# Altium PCB 海关全向控制器主控板V4.PcbDoc (part 3 of 3)
Units mil, origin at the board's own origin, x right, y up, seen from the top; angles counter-clockwise.
Board outline 3779.53 x 2795.28 mil, 2 copper layers (Top Layer, Bottom Layer), stack 65.792 mil thick; 119 components, 89 nets, 395 pads, 56 vias.
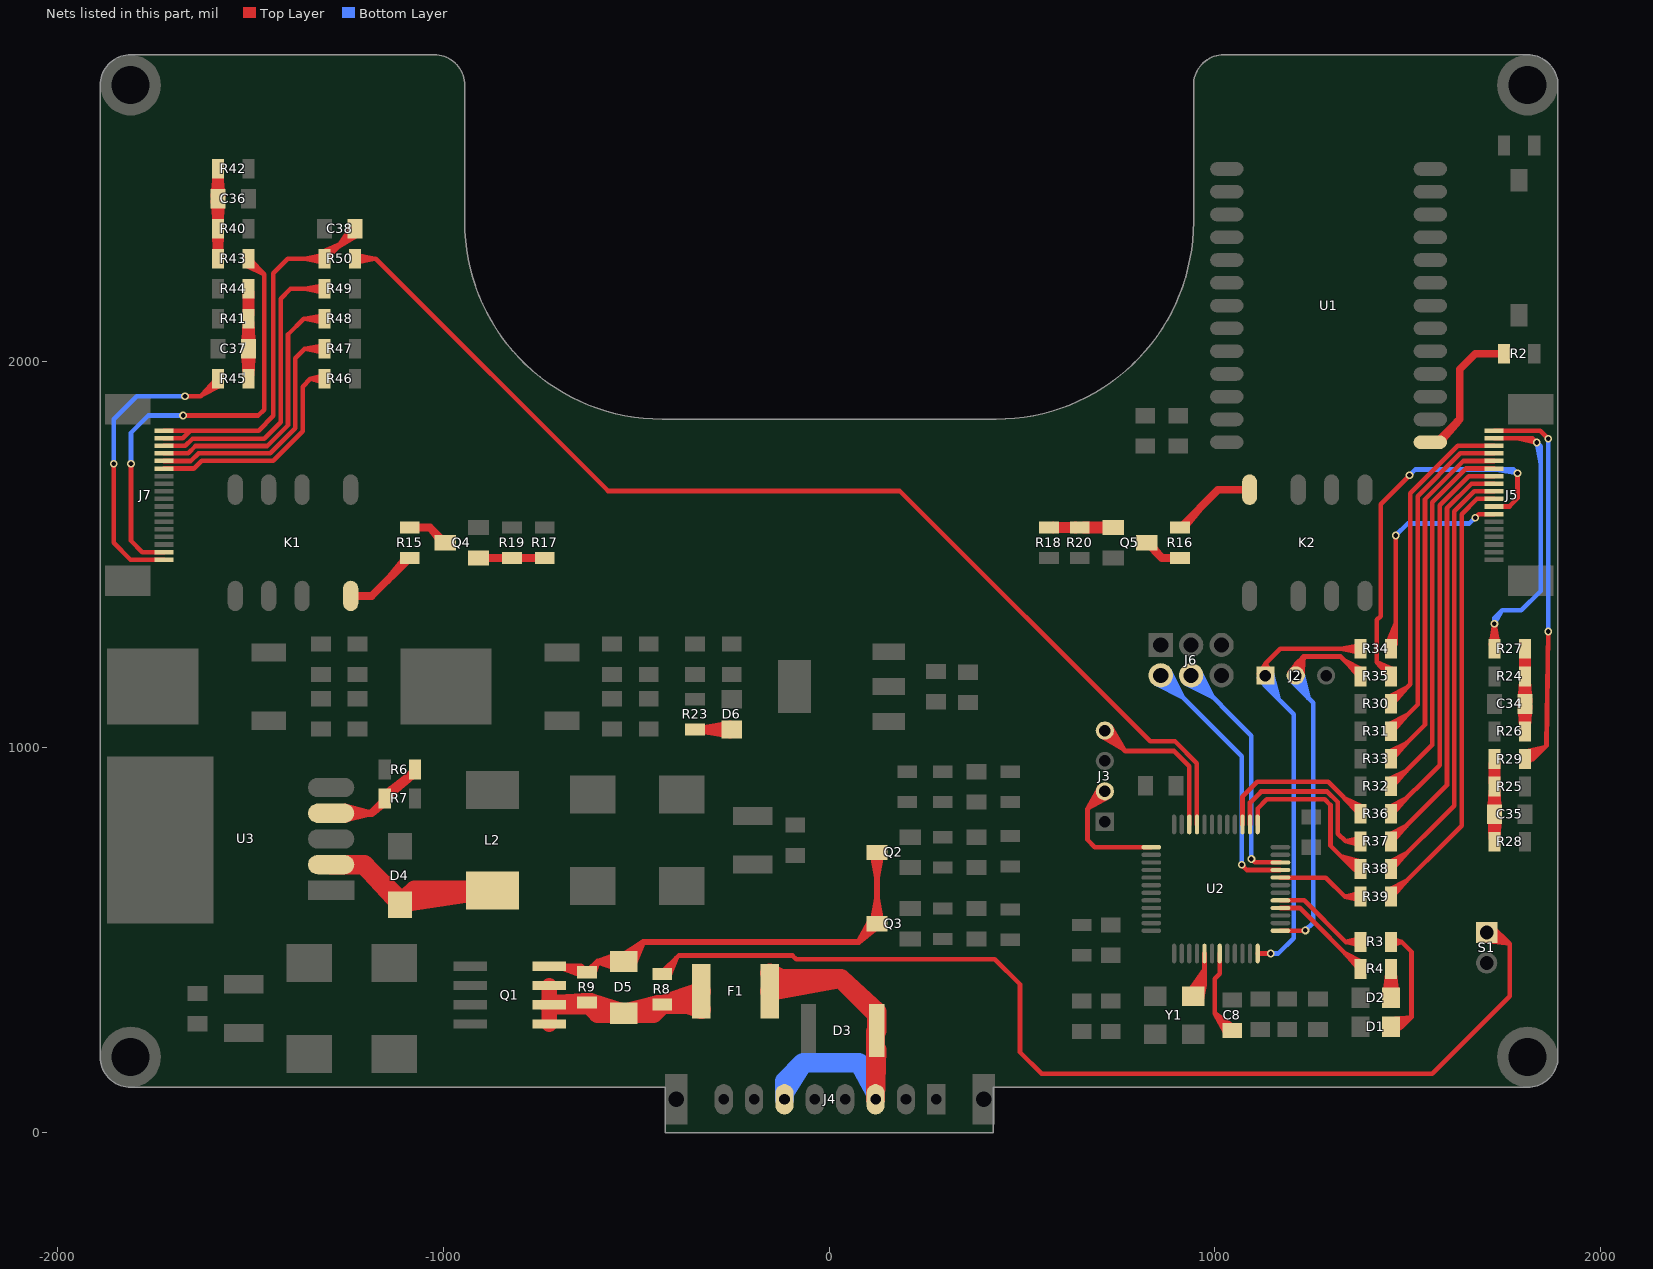
[diagram p3: the nets of this part, all layers, seen from the top]

## Via types
v1: diameter 20, hole 12, Top Layer to Bottom Layer, tented both sides, 31 vias
v2: diameter 30, hole 20, Top Layer to Bottom Layer, tented both sides, 12 vias
v3: diameter 50, hole 30, Top Layer to Bottom Layer, tented both sides, 8 vias
v4: diameter 60, hole 40, Top Layer to Bottom Layer, tented both sides, 5 vias

## Nets (pads, with @x,y where several pads share a name; then routed paths per layer and width w, separated by ;. In a path a pad name is that pad's centre, name@x,y a point inside that pad or via, vN(x,y) a via of type N, cw(c..) or ccw(c..) an arc to the next point about the centre after c; other vN are vias at no path point) (continued)
NetC34_1: C34.1 R24.2 R26.1 R27.2 | length 2636.6
  Top Layer w12: C34.1@1790.7,1106.94 R26.1@1794.67,1051.47 ; C34.1@1790.7,1117.33 R24.2@1794.67,1172.81 ; C34.1@1791.29,1102.2 R26.1@1814.07,1051.47 ; C34.1@1791.29,1122.07 R24.2@1814.07,1172.81 ; R24.2@1794.67,1192.49 R27.2@1794.67,1244.24 ; R24.2@1795.01,1196.13 R27.2@1814.07,1244.24 ; R26.1@1804.37,1040.71 C34.1@1804.37,1112.14 R24.2@1804.37,1183.57 R27.2@1804.37,1255 ; R24.2@1813.73,1196.13 R27.2@1794.67,1244.24 ; R24.2@1814.07,1192.49 R27.2@1814.07,1244.24 ; C34.1@1817.45,1102.2 R26.1@1794.67,1051.47 ; C34.1@1817.45,1122.07 R24.2@1794.67,1172.81 ; C34.1@1818.04,1106.94 R26.1@1814.07,1051.47 ; C34.1@1818.04,1117.33 R24.2@1814.07,1172.81 ; R26.1@1794.67,1051.47 C34.1@1804.37,1106.23 ; R26.1@1794.67,1051.47 C34.1@1804.37,1102.3 ; R24.2@1794.67,1172.81 C34.1@1804.37,1118.04 ; R24.2@1794.67,1172.81 C34.1@1804.37,1121.98 ; R27.2@1794.67,1244.24 R24.2@1804.37,1193.41 ; R27.2@1794.67,1244.24 R24.2@1804.37,1193.41 ; R26.1@1804.37,1050.55 C34.1@1804.37,1106.23 ; R26.1@1804.37,1050.55 1790.79,1104.55 R26.1@1804.37,1050.55 ; R26.1@1804.37,1050.55 1817.95,1104.55 R26.1@1804.37,1050.55 ; R26.1@1804.37,1050.55 C34.1@1804.37,1106.23 ; R26.1@1804.37,1050.55 C34.1@1804.37,1102.3 ; C34.1@1804.37,1102.3 R26.1@1814.07,1051.47 ; C34.1@1804.37,1106.23 R26.1@1814.07,1051.47 ; C34.1@1804.37,1118.04 R24.2@1804.37,1173.73 ; C34.1@1804.37,1118.04 R24.2@1814.07,1172.81 ; C34.1@1804.37,1118.04 R24.2@1804.37,1173.73 ; C34.1@1804.37,1121.98 R24.2@1804.37,1173.73 ; C34.1@1804.37,1121.98 R24.2@1814.07,1172.81 ; R24.2@1804.37,1173.73 1817.95,1119.73 R24.2@1804.37,1173.73 ; R24.2@1804.37,1173.73 1790.79,1119.73 R24.2@1804.37,1173.73 ; R24.2@1804.37,1193.41 R27.2@1804.37,1245.16 ; R24.2@1804.37,1193.41 R27.2@1814.07,1244.24 ; R24.2@1804.37,1193.41 R27.2@1804.37,1245.16 ; R24.2@1804.37,1193.41 R27.2@1804.37,1245.16 ; R24.2@1804.37,1193.41 R27.2@1814.07,1244.24 ; R27.2@1804.37,1245.16 1814.07,1194.33 R27.2@1804.37,1245.16 ; R27.2@1804.37,1245.16 1794.67,1194.33 R27.2@1804.37,1245.16
NetC35_1: C35.1 R25.2 R28.1 R29.2 | length 2607.1
  Top Layer w12: C35.1@1711.96,831.61 R25.2@1715.93,887.09 ; C35.1@1712.05,818.83 R28.1@1725.63,764.83 ; C35.1@1712.55,836.35 R25.2@1735.33,887.09 ; R25.2@1715.93,906.77 R29.2@1715.93,958.52 ; R28.1@1716,763.34 C35.1@1712.79,815.9 ; R25.2@1716.27,910.41 R29.2@1735.33,958.52 ; R28.1@1716.44,768.07 C35.1@1738.47,815.9 ; R28.1@1725.63,754.99 C35.1@1725.63,826.42 R29.2@1725.63,969.28 ; C35.1@1725.63,820.51 R28.1@1725.63,764.83 ; R28.1@1734.82,768.07 C35.1@1712.79,815.9 ; R25.2@1734.99,910.41 R29.2@1715.93,958.52 ; R28.1@1735.26,763.34 C35.1@1738.47,815.9 ; R25.2@1735.33,906.77 R29.2@1735.33,958.52 ; C35.1@1738.71,836.35 R25.2@1715.93,887.09 ; C35.1@1739.21,818.83 R28.1@1725.63,764.83 ; C35.1@1739.3,831.61 R25.2@1735.33,887.09 ; C35.1@1712.79,815.9 R28.1@1725.63,764.83 ; R25.2@1715.93,887.09 C35.1@1725.63,832.32 ; R25.2@1715.93,887.09 C35.1@1725.63,836.26 ; R29.2@1715.93,958.52 R25.2@1725.63,907.69 ; R29.2@1715.93,958.52 R25.2@1725.63,907.69 ; R28.1@1725.63,764.83 C35.1@1725.63,816.58 ; R28.1@1725.63,764.83 C35.1@1725.63,816.58 ; R28.1@1725.63,764.83 C35.1@1738.47,815.9 ; C35.1@1725.63,816.58 1735.33,765.75 C35.1@1725.63,816.58 ; C35.1@1725.63,816.58 1715.93,765.75 C35.1@1725.63,816.58 ; C35.1@1725.63,832.32 R25.2@1725.63,888.01 ; C35.1@1725.63,832.32 R25.2@1725.63,888 ; C35.1@1725.63,832.32 R25.2@1735.33,887.09 ; C35.1@1725.63,836.26 R25.2@1725.63,888 ; C35.1@1725.63,836.26 R25.2@1735.33,887.09 ; R25.2@1725.63,888.01 1739.21,834 R25.2@1725.63,888 ; R25.2@1725.63,888.01 1712.05,834 R25.2@1725.63,888 ; R25.2@1725.63,907.69 R29.2@1725.63,959.43 ; R25.2@1725.63,907.69 R29.2@1735.33,958.52 ; R25.2@1725.63,907.69 R29.2@1725.63,959.44 ; R25.2@1725.63,907.69 R29.2@1725.63,959.43 ; R25.2@1725.63,907.69 R29.2@1735.33,958.52 ; R29.2@1725.63,959.43 1735.33,908.61 R29.2@1725.63,959.44 ; R29.2@1725.63,959.43 1715.93,908.61 R29.2@1725.63,959.44
NetC36_1: C36.1 R40.2 R42.1 R43.2 | length 2667.1
  Top Layer w12: C36.1@-1598.05,2416.68 R40.2@-1593,2360.66 ; C36.1@-1598.05,2427.61 R42.1@-1593,2483.62 ; C36.1@-1597.54,2412.51 R40.2@-1575.74,2360.66 ; C36.1@-1597.54,2431.78 R42.1@-1575.74,2483.62 ; R40.2@-1594.09,2335.15 R43.2@-1593,2282.8 ; R43.2@-1594.07,2277.19 R40.2@-1584.37,2328.02 ; R40.2@-1594.07,2355.05 C36.1@-1584.37,2405.88 ; R42.1@-1594.07,2489.24 C36.1@-1584.37,2438.41 ; R40.2@-1593.79,2331.95 R43.2@-1575.74,2282.8 ; R43.2@-1584.37,2266.43 R40.2@-1584.37,2344.29 C36.1@-1584.37,2422.14 R42.1@-1584.37,2500 ; R43.2@-1584.37,2276.27 R40.2@-1584.37,2328.02 ; R40.2@-1584.37,2354.13 C36.1@-1584.37,2405.88 ; R42.1@-1584.37,2490.16 C36.1@-1584.37,2438.41 ; R40.2@-1574.95,2331.95 R43.2@-1593,2282.8 ; R43.2@-1574.67,2277.19 R40.2@-1584.37,2328.02 ; R40.2@-1574.65,2335.15 R43.2@-1575.74,2282.8 ; R40.2@-1574.67,2355.05 C36.1@-1584.37,2405.88 ; R42.1@-1574.67,2489.24 C36.1@-1584.37,2438.41 ; C36.1@-1571.2,2412.51 R40.2@-1593,2360.66 ; C36.1@-1571.2,2431.78 R42.1@-1593,2483.62 ; C36.1@-1570.69,2416.68 R40.2@-1575.74,2360.66 ; C36.1@-1570.69,2427.61 R42.1@-1575.74,2483.62 ; R43.2@-1593,2282.8 R40.2@-1584.37,2334.44 ; R40.2@-1593,2360.66 C36.1@-1584.37,2416.24 ; R42.1@-1593,2483.62 C36.1@-1584.37,2428.05 ; R43.2@-1584.37,2282.69 R40.2@-1584.37,2334.44 ; R43.2@-1584.37,2282.69 -1594.07,2333.52 R43.2@-1584.37,2282.69 ; R43.2@-1584.37,2282.69 -1574.67,2333.52 R43.2@-1584.37,2282.69 ; R43.2@-1584.37,2282.69 R40.2@-1584.37,2334.44 ; R40.2@-1584.37,2334.44 R43.2@-1575.74,2282.8 ; R40.2@-1584.37,2360.55 C36.1@-1584.37,2416.24 ; R40.2@-1584.37,2360.55 -1597.95,2414.56 R40.2@-1584.37,2360.55 ; R40.2@-1584.37,2360.55 -1570.79,2414.56 R40.2@-1584.37,2360.55 ; R40.2@-1584.37,2360.55 C36.1@-1584.37,2416.24 ; C36.1@-1584.37,2416.24 R40.2@-1575.74,2360.66 ; C36.1@-1584.37,2428.05 R42.1@-1584.37,2483.73 ; C36.1@-1584.37,2428.05 R42.1@-1575.74,2483.62 ; C36.1@-1584.37,2428.05 R42.1@-1584.37,2483.73 ; R42.1@-1584.37,2483.73 -1570.79,2429.73 R42.1@-1584.37,2483.73 ; R42.1@-1584.37,2483.73 -1597.95,2429.73 R42.1@-1584.37,2483.73
NetC37_1: C37.1 R41.2 R44.1 R45.2 | length 2992.2
  Top Layer w15: C37.1@-1517.81,2027.37 R45.2@-1513.86,1965.4 ; C37.1@-1517.81,2038.34 R41.2@-1513.86,2100.31 ; C37.1@-1517.76,2025.76 R45.2@-1505.63,1964.84 ; C37.1@-1517.76,2025.8 R45.2@-1505.63,1962.27 ; C37.1@-1517.76,2039.91 R41.2@-1505.63,2103.45 ; C37.1@-1517.76,2039.96 R41.2@-1505.63,2100.87 ; C37.1@-1517.49,2024.16 R45.2@-1497.4,1965.4 ; C37.1@-1517.49,2041.55 R41.2@-1497.4,2100.31 ; R44.1@-1513.86,2178.14 R41.2@-1505.63,2120.56 ; R44.1@-1513.86,2178.17 R41.2@-1505.63,2117.98 ; R44.1@-1513.86,2179.31 R41.2@-1513.86,2121.12 ; R44.1@-1513.69,2176.99 R41.2@-1497.4,2121.12 ; R45.2@-1505.63,1955 C37.1@-1505.63,2032.86 R41.2@-1505.63,2110.71 R44.1@-1505.63,2188.57 ; R44.1@-1497.57,2176.99 R41.2@-1513.86,2121.12 ; R44.1@-1497.4,2178.14 R41.2@-1505.63,2120.56 ; R44.1@-1497.4,2178.17 R41.2@-1505.63,2117.98 ; R44.1@-1497.4,2179.31 R41.2@-1497.4,2121.12 ; C37.1@-1493.77,2024.16 R45.2@-1513.86,1965.4 ; C37.1@-1493.77,2041.55 R41.2@-1513.86,2100.31 ; C37.1@-1493.5,2025.76 R45.2@-1505.63,1964.84 ; C37.1@-1493.5,2025.8 R45.2@-1505.63,1962.27 ; C37.1@-1493.5,2039.91 R41.2@-1505.63,2103.45 ; C37.1@-1493.5,2039.96 R41.2@-1505.63,2100.87 ; C37.1@-1493.45,2027.37 R45.2@-1497.4,1965.4 ; C37.1@-1493.45,2038.34 R41.2@-1497.4,2100.31 ; R45.2@-1513.86,1965.4 C37.1@-1505.63,2026.95 ; R45.2@-1513.86,1965.4 C37.1@-1505.63,2025.59 ; R41.2@-1513.86,2100.31 C37.1@-1505.63,2038.76 ; R41.2@-1513.86,2100.31 C37.1@-1505.63,2040.12 ; R41.2@-1513.86,2121.12 R44.1@-1505.63,2178.73 ; R41.2@-1513.86,2121.12 R44.1@-1505.63,2181.3 ; R45.2@-1505.63,1962.27 C37.1@-1505.63,2026.95 ; R45.2@-1505.63,1964.84 C37.1@-1505.63,2026.95 ; R45.2@-1505.63,1964.84 C37.1@-1505.63,2025.59 ; C37.1@-1505.63,2025.59 R45.2@-1497.4,1965.4 ; C37.1@-1505.63,2026.95 R45.2@-1497.4,1965.4 ; C37.1@-1505.63,2038.76 R41.2@-1505.63,2100.87 ; C37.1@-1505.63,2038.76 R41.2@-1497.4,2100.31 ; C37.1@-1505.63,2038.76 R41.2@-1505.63,2103.45 ; C37.1@-1505.63,2040.12 R41.2@-1505.63,2100.87 ; C37.1@-1505.63,2040.12 R41.2@-1497.4,2100.31 ; R41.2@-1505.63,2117.98 R44.1@-1505.63,2178.73 ; R41.2@-1505.63,2120.56 R44.1@-1505.63,2178.73 ; R41.2@-1505.63,2120.56 R44.1@-1505.63,2181.3 ; R44.1@-1505.63,2178.73 R41.2@-1497.4,2121.12 ; R44.1@-1505.63,2181.3 R41.2@-1497.4,2121.12
NetD1_2: D1.2 R3.2 | length 667.6
  Top Layer w12: D1.2@1452.59,295.07 1510,300 ; D1.2@1456.77,277.95 1510,300 ; R3.2@1456.77,495 1485,495 ; R3.2@1458.45,485.4 1485,495 ; R3.2@1458.45,504.6 1485,495 ; D1.2@1465.92,262.89 1510,300 ; 1485,275 1462.27,258.26 1485,275 ; 1485,275 1462.27,291.74 1485,275 ; 1485,275 D1.2@1456.77,275 1485,275 ; 1485,275 1510,300 ; 1485,495 1510,470 1510,300
NetD2_2: D2.2 R4.2 | length 948.4
  Top Layer w12: D2.2@1439.15,352.8 R4.2@1447.44,412.29 ; D2.2@1439.95,358.21 R4.2@1466.1,412.29 ; R4.2@1447.06,414.24 D2.2@1456.77,363.41 ; D2.2@1456.77,350 R4.2@1456.77,425 ; R4.2@1456.77,415.16 D2.2@1456.77,363.41 ; R4.2@1466.47,414.24 D2.2@1456.77,363.41 ; D2.2@1473.59,358.21 R4.2@1447.44,412.29 ; D2.2@1474.39,352.8 R4.2@1466.1,412.29 ; R4.2@1447.44,412.29 D2.2@1456.77,352.95 ; D2.2@1456.77,352.95 R4.2@1456.77,412.57 ; D2.2@1456.77,352.95 R4.2@1456.77,412.57 ; D2.2@1456.77,352.95 R4.2@1466.1,412.29 ; R4.2@1456.77,412.57 1474.2,355.56 R4.2@1456.77,412.57 ; R4.2@1456.77,412.57 1439.34,355.56 R4.2@1456.77,412.57
NetD4_2: D4.2 L2.1 U3.2 | length 1355.9
  Top Layer w50: U3.2@-1291.16,695.46 -1205.46,695.46 ; U3.2@-1256.16,695.46 -1205.46,695.46 ; D4.2@-1090.76,598.16 -892.29,628.87 -1075.07,628.87 ; L2.1@-917.27,628.87 D4.2@-1112.6,594.29 ; L2.1@-872.6,628.87 -1075.07,628.87 ; -1205.46,695.46 D4.2@-1112.6,594.29 ; -1205.46,695.46 -1112.6,602.6 D4.2@-1112.6,591.34 -1075.07,628.87 ; D4.2@-1112.6,594.29 -1075.07,628.87 ; D4.2@-1112.6,594.29 -1075.07,628.87
NetD5_1: D5.1 Q1.4 Q2.3 Q3.3 R9.2 | length 2442.1
  Top Layer w15: Q1.4@-725.24,432.12 R9.2@-643.23,432.12 ; R9.2@-640.21,408.72 Q1.4@-693.74,432.12 ; R9.2@-639.83,408.6 Q1.4@-703.47,432.12 ; R9.2@-636.03,424.62 Q1.4@-703.47,432.12 ; R9.2@-635.8,424.58 Q1.4@-693.74,432.12 ; R9.2@-624.08,421.79 -600.04,444.05 ; R9.2@-617.76,416.5 -600.04,444.05 ; R9.2@-610.31,412.94 -600.04,444.05 ; D5.1@-543.85,424.28 -600.04,444.05 ; D5.1@-543.85,463.83 -600.04,444.05 ; D5.1@-540.47,444.05 -600.04,444.05 ; D5.1@-537.92,459.16 -481.65,495 ; D5.1@-524.73,444.05 -481.65,495 ; D5.1@-507.64,433.55 -481.65,495 ; Q3.3@106.13,548.95 76.97,495 ; Q3.3@111.96,543.27 124.09,606.81 Q3.3@136.22,543.27 ; Q2.3@111.96,725.98 124.09,662.44 Q2.3@136.22,725.98 ; Q3.3@116.22,542.12 76.97,495 ; Q2.3@124.09,727.12 Q3.3@124.09,542.12 76.97,495 ; Q3.3@124.76,533.44 76.97,495 ; Q1.4@-703.47,432.12 -637.44,416.5 Q1.4@-693.74,432.12 ; Q1.4@-693.74,432.12 R9.2@-643.23,432.12 ; R9.2@-643.23,432.12 R9.2@-627.6,416.5 -600.04,444.05 ; -600.04,444.05 D5.1@-532.6,444.05 -481.65,495 ; -481.65,495 76.97,495
NetD6_2: D6.2 R23.1 | length 668.2
  Top Layer w20: R23.1@-347.6,1045.63 D6.2@-252.6,1045.63 ; D6.2@-262.01,1045.63 R23.1@-337.76,1045.63 ; D6.2@-256.68,1032.05 R23.1@-337.76,1045.63 ; D6.2@-256.68,1059.2 R23.1@-337.76,1045.63 ; D6.2@-256.66,1032.05 R23.1@-339.18,1045.63 ; D6.2@-256.66,1059.21 R23.1@-339.18,1045.63 ; R23.1@-339.18,1045.63 -255.55,1045.63 R23.1@-337.76,1045.63
NetK1_8: K1.8 R15.1 | length 269.7
  Top Layer w20: K1.8@-1240.39,1392.2 -1185.55,1392.2 R15.1@-1087.12,1490.63 ; -1145.3,1432.46 R15.1@-1096.97,1490.63
NetK2_8: K2.8 R16.1 | length 296.8
  Top Layer w20: R16.1@910,1569.37 1008.43,1667.8 K2.8@1090.39,1667.8 ; R16.1@919.84,1569.37 968.17,1627.54
NetQ4_1: Q4.1 R17.1 R19.1 | length 610.9
  Top Layer w20: Q4.1@-908.82,1490.63 R19.1@-822.12,1490.63 ; Q4.1@-907.72,1490.63 -831.97,1490.63 -900.94,1490.63 R19.1@-822.12,1490.63 ; R19.1@-822.12,1490.63 -746.97,1490.63 -812.28,1490.63 R17.1@-737.12,1490.63 R19.1@-822.12,1490.63
NetQ4_3: Q4.3 R15.2 | length 200.9
  Top Layer w20: R15.2@-1087.12,1569.37 -1034.8,1569.37 ; R15.2@-1077.28,1569.37 -1034.8,1569.37 ; Q4.3@-1003.31,1530 -1034.8,1569.37 ; Q4.3@-995.43,1530 -1034.8,1569.37
NetQ5_1: Q5.1 R18.1 R20.1 | length 1749.5
  Top Layer w12: R18.1@570,1569.37 R20.1@650,1569.37 Q5.1@736.69,1569.37 ; R18.1@579.84,1569.37 R20.1@631.59,1569.37 ; R18.1@580.76,1559.67 R20.1@631.59,1569.37 ; R18.1@580.76,1579.07 R20.1@631.59,1569.37 ; R20.1@637.74,1559.93 R18.1@588.34,1577.63 ; R20.1@637.74,1578.81 R18.1@588.34,1561.11 ; R20.1@640.79,1559.64 R18.1@588.34,1561.11 ; R20.1@640.79,1579.1 R18.1@588.34,1577.63 ; R20.1@658.91,1559.67 Q5.1@713.02,1559.34 ; R20.1@658.91,1579.07 Q5.1@713.02,1579.4 ; R20.1@662.5,1559.99 Q5.1@713.02,1579.4 ; R20.1@662.5,1578.75 Q5.1@713.02,1559.34 ; Q5.1@727.14,1555.79 R20.1@673.13,1569.37 ; Q5.1@727.14,1582.95 R20.1@673.13,1569.37 ; Q5.1@728.82,1569.37 R20.1@673.13,1569.37 ; R18.1@588.34,1561.11 R20.1@640.16,1569.37 ; R18.1@588.34,1577.63 R20.1@640.16,1569.37 ; R18.1@588.41,1569.37 R20.1@640.16,1569.37 ; R18.1@588.41,1569.37 639.24,1579.07 R18.1@588.41,1569.37 ; R18.1@588.41,1569.37 639.24,1559.67 R18.1@588.41,1569.37 ; R18.1@588.41,1569.37 R20.1@640.16,1569.37 ; R20.1@659.84,1569.37 Q5.1@711.59,1569.37 ; R20.1@659.84,1569.37 Q5.1@713.02,1559.34 ; R20.1@659.84,1569.37 Q5.1@711.59,1569.37 ; R20.1@659.84,1569.37 Q5.1@713.02,1579.4 ; Q5.1@711.59,1569.37 660.76,1559.67 Q5.1@711.59,1569.37 ; Q5.1@711.59,1569.37 660.76,1579.07 Q5.1@711.59,1569.37
NetQ5_3: Q5.3 R16.2 | length 190.9
  Top Layer w20: Q5.3@823.31,1530 862.68,1490.63 ; Q5.3@831.18,1530 862.68,1490.63 ; R16.2@900.16,1490.63 862.68,1490.63 ; R16.2@910,1490.63 862.68,1490.63
NetR2_2: R2.2 U1.22 | length 459.6
  Top Layer w20: U1.22@1533.78,1790.67 1575.67,1790.67 1635,1850 1635,1980 1675,2020 R2.2@1749.51,2020 ; U1.22@1584.37,1790.67 1631.29,1846.29
NetR6_2: R6.2 R7.1 U3.4 | length 739.2
  Top Layer w20: U3.4@-1291.16,828.79 -1195.3,828.79 ; U3.4@-1256.16,828.79 -1195.3,828.79 ; U3.4@-1254.32,813.91 -1195.3,828.79 ; U3.4@-1254.32,843.68 -1195.3,828.79 ; R7.1@-1151.97,857.28 -1186.56,828.79 ; R7.1@-1151.97,876.97 -1092.23,923.13 R6.2@-1073.23,932.28 ; -1134.92,890.14 R6.2@-1073.23,932.28 ; -1131.41,883.95 R6.2@-1073.23,932.28 ; R6.2@-1073.23,942.12 -1186.56,828.79 ; -1195.3,828.79 -1186.56,828.79
NetR8_2: R8.2 S1.1 | length 3506.9
  Top Layer w12: R8.2@-432.6,411.5 -432.6,417.4 -390,460 -95,460 -85,450 430,450 495,385 495,208.89 550.89,153 1564.11,153 1765,353.89 1765,490 ; R8.2@-430.45,417.49 -395.14,454.86 ; R8.2@-422.76,411.5 -395.14,454.86 ; R8.2@-414.08,407.06 -395.14,454.86 ; S1.1@1698.77,498.73 1765,490 ; S1.1@1701.42,510.51 1765,490 ; S1.1@1709.81,527.63 1765,490 ; S1.1@1717.48,536.95 1765,490 ; S1.1@1705,519.37 1735.63,519.37 ; S1.1@1705,519.37 1765,490 ; S1.1@1705,519.37 1735.63,519.37 ; 1735.63,519.37 1706.49,509.93 1735.63,519.37 ; 1735.63,519.37 1706.49,528.81 1735.63,519.37 ; 1735.63,519.37 1712.59,499.19 1735.63,519.37 ; 1735.63,519.37 1712.59,539.55 1735.63,519.37 ; 1735.63,519.37 1765,490
NRST: C8.1 U2.7 | length 434.5
  Top Layer w12: U2.7@1012.72,445 1012.72,412.72 ; U2.7@1012.72,465.08 1012.72,412.72 ; C8.1@1027.8,257.9 1000,310.63 ; C8.1@1039.09,265.63 1000,310.63 ; C8.1@1045,265.63 1000,310.63 ; C8.1@1048.33,275.73 1000,310.63 ; 1000,310.63 1000,400 1012.72,412.72
PADDET: R50.2 U2.33 | length 3028.5
  Top Layer w12: R50.2@-1229.41,2266.43 -1175.17,2266.43 -573.11,1664.37 183.11,1664.37 832.48,1015 896.87,1015 953.66,958.21 U2.33@953.66,799.72 ; R50.2@-1228.49,2256.72 -1177.66,2266.43 R50.2@-1228.49,2276.13 ; U2.33@953.66,819.8 953.66,861.31
POWLED1: R36.2 U2.27 | length 625.2
  Top Layer w12: U2.27@1071.77,799.72 1071.77,871.77 1110,910 1293.74,910 1376.59,827.15 R36.2@1378.03,827.15 ; U2.27@1071.77,819.8 1071.77,861.31 ; R36.2@1371.57,829.7 1336.23,867.51 ; R36.2@1378.03,837 1336.23,867.51 ; R36.2@1383.01,845.38 1336.23,867.51
POWLED2: R37.2 U2.26 | length 609.5
  Top Layer w12: U2.26@1091.46,799.72 1091.46,856.46 ; U2.26@1091.46,819.8 1091.46,856.46 ; R37.2@1376.8,746.05 1339.28,755.72 ; R37.2@1376.8,765.39 1339.28,755.72 ; 1091.46,856.46 1120,885 1291.87,885 1319,857.87 1319,776 1339.28,755.72 ; 1339.28,755.72 R37.2@1378.03,755.72 1339.28,755.72
POWLED3: R38.2 U2.25 | length 726.3
  Top Layer w12: U2.25@1111.14,799.72 1111.14,841.14 ; U2.25@1111.14,819.8 1111.14,841.14 ; R38.2@1373.22,685.65 1328.3,716.7 ; R38.2@1378.03,694.14 1328.3,716.7 ; R38.2@1381.25,703.34 1328.3,716.7 ; 1111.14,841.14 1135,865 1285,865 1300,850 1300,745 1360.71,684.29 ; 1360.71,684.29 1375.29,693.65 1360.71,684.29 ; 1360.71,684.29 1375.29,674.94 1360.71,684.29 ; 1360.71,684.29 R38.2@1378.03,684.29 1360.71,684.29
POWLED4: R39.2 U2.20 | length 392.3
  Top Layer w12: U2.20@1170.2,661.93 1288.07,661.93 1337.14,612.86 ; U2.20@1190.28,661.93 1231.79,661.93 ; R39.2@1376.87,603.18 1337.14,612.86 ; R39.2@1376.87,622.54 1337.14,612.86 ; 1337.14,612.86 R39.2@1378.03,612.86 1337.14,612.86
SKEY1: J5.16 R30.1 | length 1032.3
  Top Layer w12: R30.1@1451.62,1131 1497.97,1154.08 ; R30.1@1456.77,1112.88 1507,1163.11 1507,1658.87 1629.63,1781.5 J5.16@1724.41,1781.5 ; R30.1@1456.77,1122.72 1497.97,1154.08 ; R30.1@1463.38,1115.55 1497.97,1154.08 ; 1663.8,1781.5 J5.16@1705.71,1781.5
SKEY2: J5.15 R31.1 | length 1079.8
  Top Layer w12: R31.1@1451.62,1059.57 1497.97,1082.65 ; R31.1@1456.77,1041.44 1526,1110.68 1526,1651 1636.81,1761.81 J5.15@1724.41,1761.81 ; R31.1@1456.77,1051.29 1497.97,1082.65 ; R31.1@1463.38,1044.12 1497.97,1082.65 ; 1663.8,1761.81 J5.15@1705.71,1761.81
SKEY3: J5.13 R32.1 | length 1174.9
  Top Layer w12: R32.1@1451.62,916.7 1497.97,939.79 ; R32.1@1456.77,898.58 1564,1005.81 1564,1635.26 1651.18,1722.44 J5.13@1724.41,1722.44 ; R32.1@1456.77,908.43 1497.97,939.79 ; R32.1@1463.38,901.26 1497.97,939.79 ; 1663.8,1722.44 J5.13@1705.71,1722.44
SKEY4: J5.14 R33.1 | length 1127.3
  Top Layer w12: R33.1@1451.62,988.13 1497.97,1011.22 ; R33.1@1456.77,970.01 1545,1058.25 1545,1643.13 1644,1742.13 J5.14@1724.41,1742.13 ; R33.1@1456.77,979.86 1497.97,1011.22 ; R33.1@1463.38,972.69 1497.97,1011.22 ; 1663.8,1742.13 J5.14@1705.71,1742.13
SPLED1: J5.12 R36.1 | length 1222.4
  Top Layer w12: R36.1@1451.62,845.27 1497.97,868.36 ; R36.1@1456.77,827.15 1583,953.38 1583,1627.39 1658.37,1702.76 J5.12@1724.41,1702.76 ; R36.1@1456.77,837 1497.97,868.36 ; R36.1@1463.38,829.83 1497.97,868.36 ; 1663.8,1702.76 J5.12@1705.71,1702.76
SPLED2: J5.11 R37.1 | length 1268.2
  Top Layer w12: R37.1@1451.62,773.84 1497.97,796.93 ; R37.1@1456.77,755.72 1602,900.95 1602,1619.52 1665.55,1683.07 ; R37.1@1456.77,765.57 1497.97,796.93 ; R37.1@1463.38,758.4 1497.97,796.93 ; J5.11@1705.71,1683.07 1665.55,1683.07 ; J5.11@1724.41,1683.07 1665.55,1683.07
SPLED3: J5.10 R38.1 | length 1308.5
  Top Layer w12: R38.1@1451.62,702.41 1497.97,725.5 ; R38.1@1456.77,684.29 1621,848.52 1621,1611.65 1672.74,1663.39 ; R38.1@1456.77,694.14 1497.97,725.5 ; R38.1@1463.38,686.97 1497.97,725.5 ; J5.10@1705.71,1663.39 1672.74,1663.39 ; J5.10@1724.41,1663.39 1672.74,1663.39
SPLED4: J5.9 R39.1 | length 1348.9
  Top Layer w12: R39.1@1451.62,630.98 1497.97,654.07 ; R39.1@1456.77,612.86 1640,796.09 1640,1603.78 1679.92,1643.7 ; R39.1@1456.77,622.7 1497.97,654.07 ; R39.1@1463.38,615.54 1497.97,654.07 ; J5.9@1705.71,1643.7 1679.92,1643.7 ; J5.9@1724.41,1643.7 1679.92,1643.7
SROKEY2_X: J5.17 R27.1 | length 1310.3
  Top Layer w12: R27.1@1715.93,1265.76 v1@1725.63,1316.59 ; R27.1@1717.57,1274.37 v1(1725,1320) ; J5.17@1724.41,1801.18 1823.82,1801.18 ; R27.1@1725.63,1255 1725.63,1319.37 v1(1725,1320) ; R27.1@1725.63,1264.84 v1@1725.63,1316.59 ; R27.1@1733.64,1274.64 v1(1725,1320) ; R27.1@1735.33,1265.76 v1@1725.63,1316.59 ; J5.17@1743.11,1801.18 1785.02,1801.18 ; 1784.74,1801.18 v1(1835,1790) ; v1(1725,1320) 1725.63,1273.98 v1(1725,1320) ; 1823.82,1801.18 v1(1835,1790) ; 1823.82,1801.18 v1(1835,1790) ; 1823.82,1801.18 v1(1835,1790)
  Bottom Layer w12: 1845,1734.26 v1(1835,1790) 1845,1780 1845,1405 1795,1355 1745,1355 ; v1(1725,1320) 1725,1335 ; v1(1725,1320) 1745,1355 ; v1(1725,1320) 1725,1335 ; 1725,1335 1745,1355
SROKEY2_Y: J5.18 R29.1 | length 1353
  Top Layer w12: J5.18@1724.41,1820.87 1844.13,1820.87 ; J5.18@1743.11,1820.87 1785.02,1820.87 ; R29.1@1801.59,988.46 1854.95,999.22 ; R29.1@1804.37,979.12 1854.95,999.22 ; R29.1@1808.77,970.42 1854.95,999.22 ; v1(1865,1300) 1860,1004.28 1825,969.28 ; 1825,969.28 R29.1@1804.37,969.28 1825,969.28 ; 1825,969.28 1806.67,959.81 1825,969.28 ; 1825,969.28 1806.67,978.75 1825,969.28 ; 1844.13,1820.87 v1(1865,1800) 1844.13,1820.87
  Bottom Layer w12: v1(1865,1300) v1(1865,1800)
SRX: J5.7 R34.1 | length 770.1
  Top Layer w12: R34.1@1447.46,1267.73 1469,1320.64 ; R34.1@1456.77,1255 1469,1267.23 v1(1469,1549) ; R34.1@1456.77,1264.84 1469,1320.64 ; R34.1@1466.43,1263.57 1469,1320.64 ; v1(1675,1595) 1684.33,1604.33 ; J5.7@1705.71,1604.33 1684.33,1604.33 ; J5.7@1724.41,1604.33 1684.33,1604.33
  Bottom Layer w12: v1(1469,1549) 1500,1580 1660,1580 v1(1675,1595)
STX: J5.8 R35.1 | length 1260.8
  Top Layer w12: R35.1@1450.2,1186.21 1420,1220.34 ; R35.1@1456.77,1183.57 1420,1220.34 ; R35.1@1456.77,1193.41 1420,1220.34 ; R35.1@1461.65,1201.85 1420,1220.34 ; 1469.54,1669.54 v1(1505,1705) 1430,1630 1430,1340 1420,1330 1420,1220.34 ; J5.8@1724.41,1624.02 1764.02,1624.02 ; J5.8@1743.11,1624.02 1764.02,1624.02 ; v1(1785,1710) 1785,1645 1764.02,1624.02
  Bottom Layer w12: v1(1505,1705) 1520,1720 1775,1720 v1(1785,1710) 1729.38,1720
SWCLK: J3.2 U2.37 | length 550.3
  Top Layer w12: J3.2@700.93,896.25 670,840.63 ; J3.2@725.62,871.56 670,840.63 ; 773.96,740.67 U2.37@815.47,740.67 ; U2.37@835.55,740.67 689.33,740.67 670,760 670,840.63 ; 670,840.63 J3.2@715,885.63 670,840.63
SWDIO: J3.4 U2.34 | length 588.7
  Top Layer w12: J3.4@704.22,1029.17 764.08,994.03 J3.4@728.94,1053.89 ; J3.4@715,1043.11 768.11,990 895,990 933.98,951.02 U2.34@933.98,799.72 ; U2.34@933.98,819.8 933.98,861.31
TESTLED1: R3.1 U2.17 | length 408.1
  Top Layer w12: U2.17@1170.2,602.87 1232.13,602.87 1340,495 ; U2.17@1190.28,602.87 1231.79,602.87 ; R3.1@1376.78,485.33 1340,495 ; R3.1@1376.78,504.67 1340,495 ; 1340,495 R3.1@1378.03,495 1340,495
TESTLED2: R4.1 U2.16 | length 458.3
  Top Layer w12: U2.16@1170.2,583.19 1219.84,583.19 ; U2.16@1190.28,583.19 1219.84,583.19 ; R4.1@1371.42,427.68 1336.82,466.2 ; R4.1@1378.03,425 1219.84,583.19 ; R4.1@1378.03,434.84 1336.82,466.2 ; R4.1@1383.18,443.12 1336.82,466.2
TKEY5: J7.6 R46.1 | length 695.9
  Top Layer w12: J7.6@-1724.41,1722.44 -1647.56,1722.44 -1627,1743 -1441.39,1743 -1365,1819.39 -1365,1935 -1345,1955 ; J7.6@-1705.71,1722.44 -1663.8,1722.44 ; R46.1@-1309.44,1945.34 -1345,1955 ; R46.1@-1309.44,1964.66 -1345,1955 ; R46.1@-1308.15,1955 -1345,1955
TKEY6: J7.5 R47.1 | length 788.5
  Top Layer w12: J7.5@-1724.41,1742.13 -1654.74,1742.13 -1634.87,1762 -1449.26,1762 -1384,1827.26 -1384,2008.86 -1360,2032.86 R47.1@-1308.15,2032.86 ; J7.5@-1705.71,1742.13 -1663.8,1742.13 ; R47.1@-1309.07,2023.15 -1359.9,2032.86 R47.1@-1309.07,2042.56
TKEY7: J7.4 R48.1 | length 843.8
  Top Layer w12: J7.4@-1724.41,1761.81 -1661.93,1761.81 -1642.74,1781 -1457.13,1781 -1403,1835.13 -1403,2070 -1362.29,2110.71 R48.1@-1308.15,2110.71 ; J7.4@-1705.71,1761.81 -1663.8,1761.81 ; R48.1@-1309.07,2101.01 -1359.9,2110.71 R48.1@-1309.07,2120.42
TKEY8: J7.3 R49.1 | length 912.4
  Top Layer w12: J7.3@-1724.41,1781.5 -1669.11,1781.5 ; J7.3@-1705.71,1781.5 -1669.11,1781.5 ; R49.1@-1309.07,2178.87 -1359.9,2188.57 R49.1@-1309.07,2198.28 ; R49.1@-1308.15,2188.57 -1396.43,2188.57 -1422,2163 -1422,1843 -1465,1800 -1650.61,1800 -1669.11,1781.5
TPADDET: C38.2 J7.1 J7.2 R50.1 | length 1518
  Top Layer w12: J7.2@-1724.41,1801.18 -1676.3,1801.18 ; J7.1@-1724.41,1820.87 -1654.13,1820.87 ; J7.2@-1705.71,1801.18 -1676.3,1801.18 ; J7.1@-1705.71,1820.87 -1663.8,1820.87 ; R50.1@-1312.77,2284.86 -1265.03,2304.97 ; R50.1@-1309.07,2256.72 -1359.9,2266.43 R50.1@-1309.07,2276.13 ; R50.1@-1308.15,2261.93 -1308.07,2261.93 -1231.34,2338.66 C38.2@-1229.41,2338.66 ; R50.1@-1308.15,2266.43 -1403.57,2266.43 -1441,2229 -1441,1859 -1479.13,1820.87 -1654.13,1820.87 ; R50.1@-1308.15,2276.27 -1265.03,2304.97 ; R50.1@-1302.01,2268.7 -1265.03,2304.97 ; C38.2@-1239.9,2347.17 -1273.23,2296.77 ; C38.2@-1229.41,2338.38 -1273.23,2296.77 ; C38.2@-1221.17,2327.45 -1273.23,2296.77 ; -1676.3,1801.18 -1656.61,1820.87 -1654.13,1820.87
TROKER1_X: J7.17 R43.1 | length 1346.5
  Top Layer w12: v1(-1810,1735) -1810,1535 -1780.91,1505.91 ; J7.17@-1743.11,1505.91 -1780.91,1505.91 ; J7.17@-1724.41,1505.91 -1780.91,1505.91 ; v1(-1675,1860) -1480,1860 -1465,1875 -1465,2225.8 ; R43.1@-1510.75,2248.29 -1465,2225.8 ; R43.1@-1505.63,2256.59 -1465,2225.8 ; R43.1@-1505.63,2266.43 -1465,2225.8 ; R43.1@-1499.03,2263.76 -1465,2225.8
  Bottom Layer w12: v1(-1810,1735) -1810,1815 -1765,1860 v1(-1675,1860)
TROKER1_Y: J7.18 R45.1 | length 980.1
  Top Layer w12: v1(-1855,1735) -1855,1530 -1811.22,1486.22 J7.18@-1724.41,1486.22 ; -1785.02,1486.22 J7.18@-1743.11,1486.22 ; v1(-1670,1910) -1629.37,1910 R45.1@-1584.37,1955 ; R45.1@-1590.98,1952.32 -1625.57,1913.8 ; R45.1@-1584.37,1945.16 -1625.57,1913.8 ; R45.1@-1579.22,1936.88 -1625.57,1913.8
  Bottom Layer w12: v1(-1855,1735) -1855,1850 -1795,1910 v1(-1670,1910)
TTL_RX2: J2.2 R35.2 U2.13 | length 1932.6
  Top Layer w12: U2.13@1170.2,524.13 1234.13,524.13 v1(1235,525) ; U2.13@1188.97,524.13 v1(1235,525) ; J2.2@1195,1195.01 1230,1235 ; J2.2@1227.2,1181.93 1230,1235 ; v1@1231.79,524.13 1190.28,524.13 v1(1235,525) ; R35.2@1371.42,1186.24 1336.82,1224.77 ; R35.2@1378.03,1183.57 1326.6,1235 1230,1235 ; R35.2@1378.03,1193.41 1336.82,1224.77 ; R35.2@1383.18,1201.69 1336.82,1224.77 ; J2.2@1210,1185.76 1210,1215 ; J2.2@1210,1185.76 1230,1235 ; J2.2@1210,1185.76 1210,1215 ; 1210,1215 1226.8,1191.07 1210,1215 ; 1210,1215 1193.2,1191.07 1210,1215 ; 1210,1215 1230,1235
  Bottom Layer w12: J2.2@1195.92,1175.17 1243.72,1126.28 ; J2.2@1226.32,1192.4 1243.72,1126.28 ; v1(1235,525) 1255,545 1255,1115 1210,1160 ; 1210,1160 J2.2@1210,1185.76 ; 1210,1160 1193.44,1179.73 1210,1160 ; 1210,1160 1226.56,1179.73 1210,1160 ; 1210,1160 J2.2@1210,1185.76 ; 1210,1160 J2.2@1210,1185.76 ; J2.2@1210,1185.76 1243.72,1126.28
TTL_RX3: J6.4 U2.22 | length 983.5
  Top Layer w12: v1(1095,710) 1103.7,701.3 U2.22@1170.2,701.3 ; 1108.61,701.3 U2.22@1150.12,701.3
  Bottom Layer w12: J6.4@923.79,1165.61 995.69,1129.31 ; J6.4@930.03,1175.95 995.69,1129.31 ; J6.4@938.74,1186.26 1095,1030 v1(1095,710) ; J6.4@949.05,1194.97 995.69,1129.31 ; J6.4@959.39,1201.21 995.69,1129.31
TTL_TX2: J2.1 R34.2 U2.12 | length 1729.3
  Top Layer w12: J2.1@1114.39,1190.85 1131.26,1216.26 ; J2.1@1131.26,1185.76 1131.26,1216.26 ; J2.1@1148.13,1190.85 1131.26,1216.26 ; R34.2@1377.11,1245.29 1326.28,1255 R34.2@1377.11,1264.7 ; R34.2@1378.03,1255 1170,1255 1131.26,1216.26 ; U2.12@1111.14,465.08 v1(1145,465) ; U2.12@1111.14,465.08 v1(1145,465) ; U2.12@1111.14,465.08 U2.12@1111.22,465 ; U2.12@1111.22,465 v1(1145,465) ; U2.12@1111.22,465 v1(1145,465)
  Bottom Layer w12: J2.1@1117.1,1175.27 1166.13,1123.87 ; v1(1145,465) 1165,465 1205,505 1205,1085 1131.26,1158.74 ; J2.1@1147.57,1192.44 1166.13,1123.87 ; 1131.26,1158.74 J2.1@1131.26,1185.76 ; 1131.26,1158.74 1114.6,1180.01 1131.26,1158.74 ; 1131.26,1158.74 1147.92,1180.01 1131.26,1158.74 ; 1131.26,1158.74 J2.1@1131.26,1185.76 ; J2.1@1131.26,1185.76 1166.13,1123.87
TTL_TX3: J6.2 U2.21 | length 1047.7
  Top Layer w12: v1(1070,695) 1083.39,681.61 U2.21@1170.2,681.61 ; 1108.61,681.61 U2.21@1150.12,681.61
  Bottom Layer w12: J6.2@845.05,1165.61 916.95,1129.31 ; J6.2@851.29,1175.95 916.95,1129.31 ; J6.2@860,1186.26 1070,976.26 v1(1070,695) ; J6.2@870.31,1194.97 916.95,1129.31 ; J6.2@880.65,1201.21 916.95,1129.31
VBAT+: D3.1 F1.1 J4.3 J4.6 | length 2027.2
  Top Layer w50: D3.1@123.58,314.21 30,400 ; -121.14,400 -154.02,414.37 -121.14,400 ; -121.14,400 F1.1@-154.02,367.12 30,400 ; -121.14,400 30,400 ; 30,400 123.58,306.42 D3.1@123.58,265 D3.1@120.51,261.93 ; D3.1@120.51,261.93 120.51,102.87 123.58,215.79 J4.3@120.51,87.12 D3.1@120.51,261.93
  Bottom Layer w50: J4.6@-115.71,87.12 -115.71,134.01 ; J4.3@120.51,87.12 120.51,139.01 ; J4.6@-115.71,102.87 -115.71,134.01 ; J4.6@-115.71,102.87 -67.6,182.12 ; J4.6@-115.71,102.87 -115.71,134.01 ; -115.71,134.01 -67.6,182.12 ; -67.6,182.12 77.4,182.12 ; 77.4,182.12 J4.3@120.51,102.87 ; 77.4,182.12 120.51,139.01 ; J4.3@120.51,102.87 120.51,139.01 ; J4.3@120.51,102.87 120.51,139.01
VCC: D5.2 F1.2 Q1.1 Q1.2 Q1.3 R8.1 R9.1 | length 1726.9
  Top Layer w40: Q1.1@-725.24,282.12 Q1.2@-725.24,332.12 Q1.3@-725.24,382.12
  Top Layer w50: R9.1@-633.23,332.12 -693.74,332.12 -637.44,337.76 Q1.2@-725.24,332.12 R9.1@-633.23,332.12 ; R9.1@-633.23,332.12 R9.1@-627.6,337.76 -600.04,310.2 ; R9.1@-617.76,337.76 -600.04,310.2 ; R9.1@-617.76,337.76 -600.04,310.2 ; R9.1@-617.76,337.76 -540.47,310.2 -600.04,310.2 ; R9.1@-617.76,337.76 -600.04,310.2 ; R9.1@-617.76,337.76 D5.2@-532.6,310.2 ; -600.04,310.2 D5.2@-532.6,310.2 ; D5.2@-532.6,310.2 R8.1@-442.44,332.76 ; D5.2@-532.6,310.2 -455.16,310.2 ; -455.16,310.2 R8.1@-442.44,332.76 ; -455.16,310.2 R8.1@-442.44,332.76 ; -455.16,310.2 R8.1@-442.44,332.76 ; -455.16,310.2 -524.73,310.2 R8.1@-442.44,332.76 ; -455.16,310.2 R8.1@-432.6,332.76 ; R8.1@-432.6,332.76 F1.2@-331.18,367.12 ; R8.1@-432.6,332.76 -365.55,332.76 ; -365.55,332.76 -422.76,332.76 F1.2@-331.18,367.12 ; -365.55,332.76 -331.18,319.88 -365.55,332.76 ; -365.55,332.76 F1.2@-331.18,367.12
XTAL: U2.5 Y1.3 | length 921.7
  Top Layer w12: Y1.3@930.75,363.22 973.35,424.23 ; Y1.3@941.15,357.14 973.35,424.23 ; Y1.3@944.21,354.21 973.35,383.35 ; Y1.3@955.41,352.01 973.35,424.23 ; Y1.3@967.3,350.06 973.35,424.23 ; 973.35,403.49 U2.5@973.35,445 ; U2.5@973.35,465.08 973.35,383.35 ; Y1.3@948.15,354.21 973.35,383.35 ; Y1.3@948.15,354.21 973.35,383.35 ; Y1.3@948.15,354.21 973.35,424.23 ; 973.35,383.35 954.35,349.84 973.35,383.35 ; 973.35,383.35 942.93,359.72 973.35,383.35 ; 973.35,383.35 965.74,345.59 973.35,383.35 ; 973.35,383.35 937.08,370.37 973.35,383.35
pads on no net: J4. J5. J7. K1.2 K1.7 K2.2 K2.7 U1.3 U1.4 U1.5 U1.6 U1.7 U1.8 U1.9 U1.10 U1.11 U1.23 U1.24 U1.25 U1.26 U1.27 U1.28 U1.29 U1.30 U1.31 U1.32 U1.33 U2.2 U2.3 U2.4 U2.6 U2.45 U2.46 Y1.1

## Keep-outs
Keep-Out Layer:
  the board outline again, w6

## Silkscreen, mask and mechanical layers (free items; w line width, h text height)
Top Overlay:
  text "+" at 600,775 h60